# Altium PCB XL992FXT10W.PcbDoc (part 2 of 2)
Units mm, origin at the board's own origin, x right, y up, seen from the top; angles counter-clockwise.
Board outline 35.2 x 48.31 mm, 2 copper layers (Top Layer, Bottom Layer); 89 components, 57 nets, 280 pads, 137 vias.
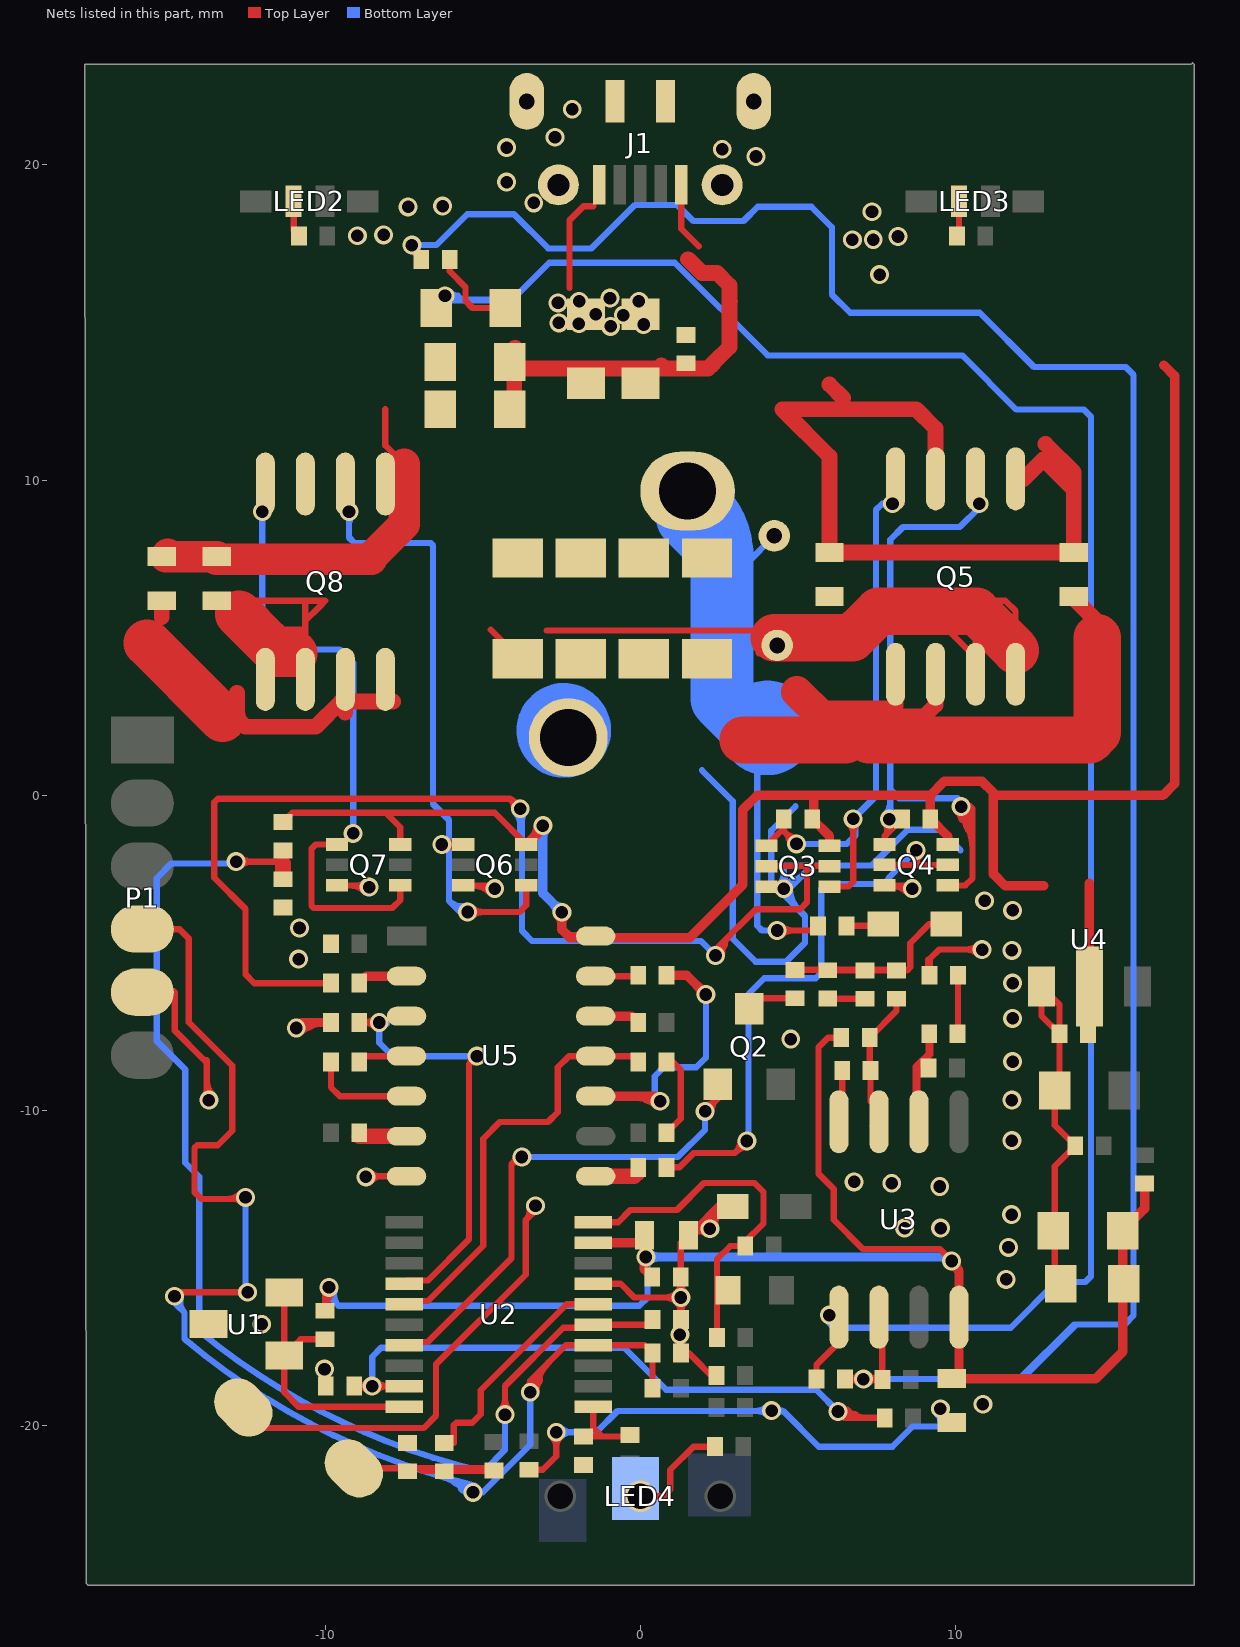
[diagram p2: the nets of this part, all layers, seen from the top]

## Via types
v1: diameter 0.6, hole 0.4, Top Layer to Bottom Layer, 137 vias

## Nets (pads, with @x,y where several pads share a name; then routed paths per layer and width w, separated by ;. In a path a pad name is that pad's centre, name@x,y a point inside that pad or via, vN(x,y) a via of type N, cw(c..) or ccw(c..) an arc to the next point about the centre after c; other vN are vias at no path point) (continued)
GND: C0.1 C1.1 C4.1 C5.1 C6.1 C8.1 C9.1 C10.2 C11.2 C13.1 C14.2 C15.2 C16.2 C17.1 C18.2 C19.1 C20.2 C34.1 D3.2 J1.5 J1.6 P1.5 pad.1@-12.598,-19.431 Q3.3 Q4.3 Q6.3 Q7.3 R7.1 R12.2 R13.1 R16.2 R31.1 R32.1 R35.2 R38.2 R40.2 R43.2 RTC1.1 U1.1 U2.7 U3.4 U4.Vss U5.7 | length 145.6
  Top Layer w0.2: P1.5@-15.8,-6.25 -14.835,-6.25 -14.808,-6.223 -14.778,-6.253 -14.778,-7.466 -13.837,-8.407 -13.763,-8.407 -13.763,-9.675 v1(-13.691,-9.675) ; pad.1@-12.598,-19.431 -11.945,-20.085 -6.879,-20.085 -6.482,-19.689 -6.482,-18.063 -3.638,-15.218 -3.638,-13.493 ; v1(-10.021,-18.212) -9.98,-18.253 C10.2@-9.98,-18.754 ; Q7.3@-9.619,-2.864 -8.769,-2.864 v1@-8.619,-2.714 ; v1@-8.784,-12.092 U5.7@-7.416,-12.092 ; R16.2@-6.05,17 -6.05,16.625 -5.548,16.122 -5.548,15.685 -5.325,15.462 R13.1@-4.282,15.462 ; Q6.3@-5.619,-2.864 -4.719,-2.864 v1(-4.619,-2.964) ; C9.1@-3.477,-21.407 -3.094,-21.407 -2.667,-20.98 v1(-2.667,-20.218) ; v1(-3.327,-13.03) -3.277,-13.081 -3.277,-13.132 -3.638,-13.493 ; -2.246,16.1 -2.246,18.25 -1.804,18.691 -1.489,18.691 ; U2.7@-1.493,-15.504 -0.626,-15.504 -0.19,-15.941 v1@1.281,-15.941 ; C15.2@-0.104,15.582 C15.2@0.059,15.744 ; R40.2@0.831,-10.714 1.281,-10.264 1.281,-8.719 1.026,-8.464 R43.2@0.831,-8.464 ; v1@2.101,-13.589 ccw(c1.949,-13.345) 2.236,-13.367 ccw(c2.522,-13.388) v1@2.336,-13.606 ; R31.1@2.43,-18.593 1.541,-17.704 C11.2@1.288,-17.704 C0.1@1.288,-16.637 ; 2.434,-13.308 cw(c1.776,-13.259) v1(2.206,-13.759) ; D3.2@2.683,-12.802 D3.2@2.683,-12.812 ; C4.1@5.949,-6.453 5.96,-6.464 R7.1@7.131,-6.464 ; U3.4@6.304,-10.365 6.408,-10.261 R12.2@6.408,-8.732 ; Q4.3@7.756,-2.864 8.531,-2.864 v1(8.631,-2.964) ; 9.131,-5.214 9.131,-5.664 C8.1@9.181,-5.714 9.181,-5.197 9.479,-4.9 v1(10.85,-4.9) ; C34.1@13.304,-7.571 12.73,-6.997 U4.Vss@12.73,-6.071 13.304,-6.645 13.304,-9.225 C18.2@13.154,-9.375 13.154,-10.475 C20.2@13.804,-11.125 13.154,-11.775 13.154,-15.281 C5.1@13.379,-15.506 ; -3.638,-13.493 ccw(c-3.949,-13.182) -3.522,-13.078 cw(c-3.949,-13.182) -3.638,-13.493 ; -2.667,-20.701 ccw(c-3.15,-20.701) -2.808,-20.36 cw(c-3.15,-20.701) -2.667,-20.701 ; -2.667,-20.701 cw(c-2.184,-20.701) -2.526,-20.36 ccw(c-2.184,-20.701) -2.667,-20.701 ; 0.805,-15.941 ccw(c0.805,-15.458) v1@1.147,-15.799 ; 0.805,-15.941 cw(c0.805,-16.423) v1@1.147,-16.082 ; 0.805,-15.941 ccw(c0.805,-15.458) v1@1.147,-15.799 ; 0.805,-15.941 cw(c0.805,-16.423) v1@1.147,-16.082 ; v1@1.147,-16.082 cw(c0.822,-16.407) 1.281,-16.407 ccw(c0.822,-16.407) v1@1.147,-16.082 ; v1@1.147,-16.082 cw(c0.805,-16.423) C0.1@1.288,-16.423 ; v1@1.147,-16.082 cw(c0.805,-16.423) C0.1@1.288,-16.423 ; v1@1.147,-15.799 ccw(c0.822,-15.474) 1.281,-15.474 cw(c0.822,-15.474) v1@1.147,-15.799 ; v1@1.147,-15.799 ccw(c0.805,-15.458) C13.1@1.288,-15.458 ; v1@1.147,-15.799 ccw(c0.805,-15.458) C13.1@1.288,-15.458 ; v1@1.281,-15.941 1.281,-16.63 C0.1@1.288,-16.637 ; v1@1.281,-15.941 C13.1@1.281,-15.291 C13.1@1.288,-15.291 ; v1@1.281,-15.941 v1(1.288,-15.941) ; C0.1@1.288,-16.637 cw(c0.874,-16.637) 1.13,-16.962 ccw(c0.874,-16.637) C0.1@1.288,-16.637 ; C0.1@1.288,-16.637 v1(1.288,-15.941) ; C0.1@1.288,-16.423 cw(c1.771,-16.423) v1@1.43,-16.082 ; C0.1@1.288,-16.423 cw(c1.771,-16.423) v1@1.43,-16.082 ; v1(1.288,-15.941) C13.1@1.288,-15.291 ; C13.1@1.288,-15.458 ccw(c1.771,-15.458) v1@1.43,-15.799 ; C13.1@1.288,-15.458 ccw(c1.771,-15.458) v1@1.43,-15.799 ; C13.1@1.288,-15.291 1.288,-14.207 C1.1@1.531,-13.964 ; v1@1.43,-16.082 ccw(c1.788,-16.44) 1.281,-16.44 cw(c1.788,-16.44) v1@1.43,-16.082 ; v1@1.43,-15.799 cw(c1.788,-15.441) 1.281,-15.441 ccw(c1.788,-15.441) v1@1.43,-15.799 ; C1.1@1.531,-13.964 cw(c1.835,-14.268) 2.089,-13.92 ccw(c1.835,-14.268) C1.1@1.531,-13.964 ; C1.1@1.531,-13.964 D3.2@2.683,-12.812 ; v1(2.206,-13.759) cw(c2.953,-13.617) 2.416,-13.079 ccw(c2.953,-13.617) v1(2.206,-13.759) ; v1(2.206,-13.759) ccw(c1.975,-14.077) 1.697,-13.798 cw(c1.975,-14.077) v1(2.206,-13.759) ; D3.2@2.683,-12.812 ccw(c3.402,-13.531) 2.403,-13.721 cw(c3.402,-13.531) D3.2@2.683,-12.812 ; 10.367,-4.9 ccw(c10.367,-4.417) 10.709,-4.758 cw(c10.367,-4.417) 10.367,-4.9 ; 10.367,-4.9 cw(c10.367,-5.383) 10.709,-5.041 ccw(c10.367,-5.383) 10.367,-4.9 ; v1@-13.832,-9.534 ccw(c-13.997,-9.368) -13.763,-9.368 cw(c-13.997,-9.368) v1@-13.832,-9.534 ; -13.763,-9.016 ccw(c-13.032,-9.016) -13.549,-9.534 cw(c-13.032,-9.016) -13.763,-9.016 ; v1@-10.156,-18.36 cw(c-10.513,-18.756) -9.98,-18.756 ccw(c-10.513,-18.756) v1@-10.156,-18.36 ; C10.2@-9.98,-18.595 cw(c-9.638,-18.595) -9.88,-18.353 ccw(c-9.638,-18.595) C10.2@-9.98,-18.595 ; -9.221,-2.864 cw(c-9.221,-3.534) -8.748,-3.06 ccw(c-9.221,-3.534) -9.221,-2.864 ; -8.957,-2.864 ccw(c-8.957,-2.568) -8.748,-2.777 cw(c-8.957,-2.568) -8.957,-2.864 ; v1@-8.566,-12.255 cw(c-8.174,-12.647) -8.174,-12.092 ccw(c-8.174,-12.647) v1@-8.566,-12.255 ; v1@-8.566,-11.972 ccw(c-8.276,-11.681) -8.276,-12.092 cw(c-8.276,-11.681) v1@-8.566,-11.972 ; Q6.3@-5.343,-2.864 cw(c-5.343,-3.688) -4.76,-3.105 ccw(c-5.343,-3.688) Q6.3@-5.343,-2.864 ; v1@1.113,-17.261 cw(c0.689,-17.685) 1.288,-17.685 ccw(c0.689,-17.685) v1@1.113,-17.261 ; C11.2@1.288,-17.52 cw(c1.654,-17.52) 1.395,-17.261 ccw(c1.654,-17.52) C11.2@1.288,-17.52 ; C0.1@1.288,-16.719 ccw(c1.654,-16.719) 1.395,-16.978 cw(c1.654,-16.719) C0.1@1.288,-16.719 ; 1.862,-13.633 cw(c2.114,-13.885) 2.324,-13.597 ccw(c2.114,-13.885) 1.862,-13.633 ; v1@2.01,-13.796 cw(c2.504,-13.702) 2.148,-13.347 ccw(c2.504,-13.702) v1@2.01,-13.796 ; Q4.3@7.907,-2.864 cw(c7.907,-3.688) 8.49,-3.105 ccw(c7.907,-3.688) Q4.3@7.907,-2.864
  Top Layer w0.3: v1(-10.918,-7.389) -10.742,-7.214 R38.2@-9.819,-7.214 ; v1@-10.829,-7.268 ccw(c-10.626,-6.99) -10.454,-7.288 ; v1@-10.812,-7.495 cw(c-10.133,-8.174) -10.133,-7.214 ccw(c-10.133,-8.174) v1@-10.812,-7.495
  Bottom Layer w0.2: v1(-2.667,-20.218) -1.398,-20.218 -0.723,-19.543 4.532,-19.543 ; 1.956,0.787 2.929,-0.186 2.929,-4.555 3.658,-5.283 4.623,-5.283 5.226,-4.68 5.226,-3.835 4.551,-3.16 v1(4.551,-2.969) ; 4.686,-3.295 cw(c5.011,-2.969) v1(4.551,-2.969) ; v1@4.751,-2.969 ccw(c5.694,-2.969) 5.027,-3.636 ; 4.908,-2.674 ccw(c5.053,-3.212) v1(4.551,-2.969) ; 4.928,-0.353 4.158,-1.122 4.158,-2.87 4.258,-2.969 v1(4.551,-2.969) ; v1(9.525,-19.471) 9.525,-19.881 ; 10.164,-1.75 9.514,-1.1 8.485,-1.1 7.352,-2.233 5.465,-2.233 ; -2.184,-20.218 ccw(c-2.184,-20.701) -2.526,-20.36 cw(c-2.184,-20.701) -2.184,-20.218 ; -2.184,-20.218 cw(c-2.184,-19.736) -2.526,-20.077 ccw(c-2.184,-19.736) -2.184,-20.218 ; 4.532,-19.543 ccw(c4.532,-19.791) 4.329,-19.648 cw(c4.532,-19.791) 4.532,-19.543 ; 4.532,-19.543 cw(c4.532,-19.319) 4.338,-19.432 ccw(c4.532,-19.319) 4.532,-19.543 ; 4.532,-19.543 5.664,-20.676 8.001,-20.676 8.644,-20.033 9.677,-20.033 9.525,-19.881 ; v1(4.551,-2.969) ccw(c4.551,-2.54) 4.854,-2.844 cw(c4.551,-2.54) v1(4.551,-2.969) ; v1(4.551,-2.969) 4.729,-2.969 5.465,-2.233 ; v1(4.551,-2.969) 4.551,-2.385 4.5,-2.334 4.602,-2.233 5.465,-2.233 ; 4.551,-2.487 ccw(c5.034,-2.487) 4.692,-2.828 cw(c5.034,-2.487) 4.551,-2.487 ; 4.551,-2.487 cw(c4.068,-2.487) 4.41,-2.828 ccw(c4.068,-2.487) 4.551,-2.487 ; 9.525,-19.881 ccw(c9.207,-19.881) 9.402,-19.629 cw(c9.207,-19.881) 9.525,-19.881 ; 9.525,-19.881 cw(c9.843,-19.881) 9.648,-19.629 ccw(c9.843,-19.881) 9.525,-19.881 ; 3.658,-19.543 ccw(c3.658,-19.025) 4.024,-19.391 cw(c3.658,-19.025) 3.658,-19.543 ; 3.708,-19.543 cw(c3.708,-19.99) 4.024,-19.674 ccw(c3.708,-19.99) 3.708,-19.543 ; v1@4.551,-2.769 ccw(c4.551,-1.857) 5.196,-2.502 cw(c4.551,-1.857) v1@4.551,-2.769
  other v1: 4.166,-19.533 10.871,-19.329 1.254,-17.12 -12.014,-16.789 11.608,-15.367 11.684,-14.351 8.386,-13.739 9.529,-13.739 11.786,-13.31 9.504,-12.418 7.98,-12.317 6.786,-12.271 -8.708,-12.113 11.79,-10.964 11.79,-9.675 11.815,-8.456 4.775,-7.74 11.815,-7.084 11.815,-5.967 -10.841,-5.205 11.79,-4.925 -10.816,-4.214 11.815,-3.655 10.926,-3.35 -8.606,-2.919 -0.942,14.878 0.106,14.938 -1.951,14.963 -2.586,14.988 -0.54,15.233 -1.415,15.259 -2.612,15.623 -1.941,15.674 -0.046,15.674 -0.961,15.776 7.595,16.518 6.731,17.628 7.391,17.63 8.179,17.729 -8.981,17.755 -8.145,17.78 7.352,18.517 -7.366,18.669 -6.274,18.694 -3.38,18.796 -4.242,19.456 3.671,20.269 2.6,20.498 -4.242,20.549 -2.708,20.879 -2.159,21.768
IN_VCC_AD: C0.2 R26.1 R32.2 U2.5 | length 40.9
  Top Layer w0.2: v1(-12.827,-2.108) -11.397,-2.108 -11.34,-2.166 R26.1@-11.34,-1.752 ; v1@-12.686,-2.25 cw(c-12.344,-2.591) -12.344,-2.108 cw(c-12.344,-1.625) v1@-12.686,-1.967 ; v1(-4.293,-19.66) -4.293,-18.748 -2.448,-16.904 -1.593,-16.904 U2.5@-1.493,-16.804 C0.2@0.381,-16.804 ; -4.293,-19.177 ccw(c-3.81,-19.177) -4.151,-19.518 cw(c-3.81,-19.177) -4.293,-19.177 ; -4.293,-19.177 cw(c-4.775,-19.177) -4.434,-19.518 ccw(c-4.775,-19.177) -4.293,-19.177
  Top Layer w0.5: R32.2@-11.34,-2.664 -11.34,-2.166
  Bottom Layer w0.2: -14.003,-16.996 ccw(c0.004,-0.032) -5.092,-21.433 -4.949,-21.433 -4.293,-20.777 v1(-4.293,-19.66) ; -14,-16.967 -14,-12.114 -14.445,-11.669 -14.445,-8.705 -15.35,-7.8 -15.35,-2.639 -14.876,-2.166 v1@-12.827,-2.166
NA_PWM: R38.1 U2.14 U5.3 | length 16.2
  Top Layer w0.2: R38.1@-8.919,-7.214 v1(-8.285,-7.214) ; U2.14@-7.493,-15.504 -7.393,-15.404 -6.748,-15.404 -5.438,-14.094 -5.438,-8.537 ; U5.3@-7.416,-7.012 U5.3@-7.07,-7.012 ; v1(-5.182,-8.28) -5.438,-8.537 ; R38.1@-8.768,-7.214 ccw(c-8.768,-6.731) -8.426,-7.072 cw(c-8.768,-6.731) R38.1@-8.768,-7.214 ; R38.1@-8.768,-7.214 cw(c-8.768,-7.697) -8.426,-7.355 ccw(c-8.768,-7.697) R38.1@-8.768,-7.214 ; -5.438,-8.537 ccw(c-5.599,-8.375) -5.377,-8.325 cw(c-5.599,-8.375) -5.438,-8.537 ; -5.438,-8.537 cw(c-5.276,-8.698) -5.226,-8.475 ccw(c-5.276,-8.698) -5.438,-8.537
  Bottom Layer w0.2: v1@-8.042,-7.257 -8.085,-7.214 v1(-8.285,-7.214) -8.285,-7.852 -7.856,-8.28 v1(-5.182,-8.28)
NB_PWM: R43.1 U2.15 U5.11 | length 13.6
  Top Layer w0.2: U2.15@-7.493,-16.154 -7.393,-16.054 -6.748,-16.054 -4.988,-14.294 -4.988,-10.904 -4.457,-10.372 -2.93,-10.372 -2.616,-10.058 -2.616,-8.636 -2.263,-8.282 U5.11@-1.416,-8.282 -0.25,-8.282 R43.1@-0.069,-8.464
NetC3_1: C3.1 C4.2 D1.2 R7.2 R8.1 | length 8.1
  Top Layer w0.2: R8.1@4.908,-5.544 8.112,-5.544 C3.1@8.131,-5.564 ; C4.2@5.949,-5.553 R7.2@7.131,-5.553 ; R7.2@7.131,-5.564 C3.1@8.131,-5.564 ; D1.2@9.717,-4.087 9.174,-4.087 8.564,-4.697 8.564,-5.462 8.463,-5.564 C3.1@8.131,-5.564
NetC3_2: C3.2 R9.2 R12.1 U3.3 | length 5.2
  Top Layer w0.2: U3.3@7.381,-10.499 U3.3@7.496,-10.614 ; U3.3@7.574,-10.365 7.531,-9.714 7.574,-9.672 7.574,-9.982 7.308,-9.717 R12.1@7.308,-8.732 7.279,-8.703 R9.2@7.279,-7.696 8.131,-6.844 C3.2@8.131,-6.464
NetC6_2: C6.2 R10.1 U2.1 | length 2.9
  Top Layer w0.2: C6.2@-1.803,-20.353 -1.219,-20.353 ; U2.1@-1.177,-19.404 U2.1@-1.493,-19.404 -1.493,-20.079 -1.219,-20.353 ; R10.1@-0.33,-20.302 -0.381,-20.353 -1.219,-20.353
NetC7_2: C7.2 R16.1 R17.1 U3.6 | length 77.6
  Top Layer w0.2: v1(-7.25,17.457) -7.25,17.3 R16.1@-6.95,17 ; C7.2@6.493,-18.53 v1(7.08,-18.53) 7.668,-18.53 R17.1@7.682,-18.545 7.682,-16.674 U3.6@7.574,-16.565 ; R16.1@-6.95,17 cw(c-6.656,17.294) -7.057,17.404 ccw(c-6.656,17.294) R16.1@-6.95,17 ; C7.2@6.598,-18.53 ccw(c6.598,-18.048) 6.939,-18.389 cw(c6.598,-18.048) C7.2@6.598,-18.53 ; C7.2@6.598,-18.53 cw(c6.598,-19.013) 6.939,-18.672 ccw(c6.598,-19.013) C7.2@6.598,-18.53 ; R17.1@7.563,-18.53 ccw(c7.563,-19.013) 7.222,-18.672 cw(c7.563,-19.013) R17.1@7.563,-18.53 ; R17.1@7.563,-18.53 cw(c7.563,-18.048) 7.222,-18.389 ccw(c7.563,-18.048) R17.1@7.563,-18.53
  Bottom Layer w0.2: v1(-7.25,17.457) -6.47,17.457 -5.492,18.435 -4.008,18.435 -2.924,17.351 -1.549,17.351 -0.171,18.73 1.177,18.73 1.686,18.221 3.274,18.221 3.727,18.674 5.431,18.674 6.081,18.024 6.081,15.89 6.665,15.306 10.776,15.306 12.495,13.588 15.402,13.588 15.654,13.335 15.654,-16.51 15.365,-16.8 13.829,-16.8 ; v1(7.08,-18.53) 12.098,-18.53 13.829,-16.8 ; 12.064,-18.497 13.762,-16.8 13.829,-16.8
NetC8_2: C8.2 R11.1 | length 1.9
  Top Layer w0.2: R11.1@10.068,-7.571 10.081,-7.557 C8.2@10.081,-5.714
NetC10_1: C10.1 R2.1 U2.19 | length 27.2
  Top Layer w0.2: C10.1@-9.08,-18.754 v1(-8.509,-18.754) U2.19@-7.493,-18.754 U2.19@-7.393,-18.654 ; v1@6.368,-19.734 cw(c6.474,-19.93) 6.585,-19.738 cw(c6.696,-19.545) v1@6.474,-19.552 ; v1@6.406,-19.708 cw(c6.656,-19.995) 6.846,-19.665 ; 6.604,-19.526 ccw(c6.462,-19.773) v1(6.274,-19.558) ; R2.1@7.754,-19.761 6.477,-19.761 v1(6.274,-19.558) ; C10.1@-8.992,-18.754 ccw(c-8.992,-18.271) -8.65,-18.613 cw(c-8.992,-18.271) C10.1@-8.992,-18.754 ; C10.1@-8.992,-18.754 cw(c-8.992,-19.237) -8.65,-18.895 ccw(c-8.992,-19.237) C10.1@-8.992,-18.754 ; U2.19@-8.026,-18.754 ccw(c-8.026,-19.237) -8.368,-18.895 cw(c-8.026,-19.237) U2.19@-8.026,-18.754 ; U2.19@-8.026,-18.754 cw(c-8.026,-18.271) -8.368,-18.613 ccw(c-8.026,-18.271) U2.19@-8.026,-18.754 ; v1(6.274,-19.558) ccw(c6.764,-19.067) 6.764,-19.761 cw(c6.764,-19.067) v1(6.274,-19.558) ; v1@6.415,-19.417 ccw(c7.247,-18.585) 7.247,-19.761 cw(c7.247,-18.585) v1@6.415,-19.417
  Bottom Layer w0.2: v1(-8.509,-18.754) -8.509,-17.82 -8.23,-17.54 -0.515,-17.54 0.817,-18.872 5.588,-18.872 v1(6.274,-19.558)
NetC23_2: C23.2 C25.1 C26.2 C27.2 C29.2 C30.2 pad.0@4.343,4.753 Q5.C1 Q8.C2 | length 48.5
  Top Layer w0.2: C29.2@-13.44,6.171 -10.575,6.171 ; Q8.C2@-11.901,3.674 -11.901,4.845 -11.496,5.25 -10.631,5.25 ; Q8.C2@-10.631,3.674 -10.631,5.25 ; -4.746,5.25 C23.2@-3.996,4.5 ; -2.973,5.227 3.81,5.227 ; 3.754,4.5 4.254,5 4.504,5.25 6.974,5.25 9.754,5.25 Q5.C1@10.639,4.365 ; pad.0@4.061,5.036 cw(c4.578,4.518) 4.578,5.25 ; pad.0@4.202,4.894 cw(c5.061,4.035) 5.061,5.25 ; pad.0@4.343,4.753 cw(c5.544,3.552) 5.544,5.25 ; pad.0@4.485,4.611 cw(c6.027,3.069) 6.027,5.25 ; pad.0@4.626,4.47 cw(c6.51,2.586) 6.51,5.25 ; Q5.C1@10.639,3.837 Q5.C1@10.639,4.365 ; Q5.C1@11.909,3.837 11.909,4.595 11.909,5.845 11.584,6.171 10.334,6.171 10.639,5.865 10.639,5.837 Q5.C1@10.639,4.365 ; -10.631,5.25 -10.631,5.536 ; -10.631,5.536 -10.166,6 -9.996,6.171 -10.575,6.171 ; -10.631,5.536 -10.631,6 -10.631,6.115 -10.575,6.171
  Top Layer w1.5: -12.746,5.75 -11.871,4.875 -11.496,4.5 -10.996,4.5 ; pad.0@4.254,5 6.724,5 6.974,5.25 7.561,5.837 10.639,5.837 10.668,5.837 Q5.C1@11.909,4.595
NetD1_1: D1.1 R5.1 | length 1.2
  Top Layer w0.2: R5.1@6.54,-4.147 7.657,-4.147 D1.1@7.717,-4.087
NetLED2_1: LED2.1 R24.2 | length 1.2
  Top Layer w0.2: LED2.1@-11.002,18.843 -11.002,17.918 R24.2@-10.834,17.75
NetLED3_1: LED3.1 R22.2 | length 1.2
  Top Layer w0.2: R22.2@10.034,17.63 10.115,17.711 LED3.1@10.115,18.843
NetLED4_2: LED4.2 pad.0@-0.152,-21.996 R21.2 | length 3.4
  Top Layer w0.2: LED4.2@0,-22.25 0.737,-22.25 0.95,-22.037 0.95,-21.412 1.687,-20.676 R21.2@2.369,-20.676
NetQ2_C: Q2.C R8.2 | length 1.6
  Top Layer w0.2: Q2.C@3.462,-6.776 3.793,-6.444 R8.2@4.908,-6.444
NetQ3_1: Q3.1 Q3.4 Q5.B2 R33.2 | length 22.4
  Top Layer w0.2: Q3.1@4.004,-1.6 4.504,-1.1 ; R33.2@4.554,-0.75 4.554,-1.144 v1(4.957,-1.547) ; 4.69,-1.295 ccw(c5.027,-1.205) v1(4.957,-1.547) ; 4.705,-1.279 cw(c4.615,-1.617) v1(4.957,-1.547) ; v1@4.707,-1.398 v1@4.805,-1.496 ; Q3.4@6.004,-2.9 6.604,-2.9 6.754,-2.75 v1(6.754,-0.75) ; 4.616,-1.206 ccw(c4.957,-0.864) 4.957,-1.347 cw(c4.957,-0.864) 4.616,-1.206 ; 4.616,-1.206 cw(c4.275,-1.547) 4.757,-1.547 ccw(c4.275,-1.547) 4.616,-1.206 ; 6.754,-1.233 ccw(c6.271,-1.233) 6.613,-0.891 cw(c6.271,-1.233) 6.754,-1.233 ; 6.754,-1.233 cw(c7.237,-1.233) 6.896,-0.891 ccw(c7.237,-1.233) 6.754,-1.233
  Bottom Layer w0.2: v1(4.957,-1.547) 6.558,-1.547 6.829,-1.276 6.829,-0.675 7.479,-0.025 7.479,9.054 7.675,9.25 ; v1(8.004,9.25) 7.675,9.25 ; 7.675,9.25 ccw(c7.675,9.421) 7.827,9.342 cw(c7.675,9.421) 7.675,9.25 ; 7.675,9.25 cw(c7.675,9.079) 7.827,9.158 ccw(c7.675,9.079) 7.675,9.25
NetQ4_1: Q4.1 Q4.4 Q5.B1 R34.1 | length 29.9
  Top Layer w0.2: Q4.1@7.756,-1.564 7.756,-1.298 ; R34.1@8.304,-0.75 7.756,-1.298 ; Q4.4@9.756,-2.864 10.317,-2.864 10.545,-2.635 10.545,-0.429 v1@10.469,-0.353 ; v1@10.132,-0.555 cw(c10.007,-1.022) 10.425,-0.78 cw(c10.843,-0.539) v1@10.376,-0.414 ; 10.212,-0.783 cw(c10.602,-0.545) v1(10.183,-0.362) ; v1@10.367,-0.442 ccw(c11.032,-0.733) 10.412,-1.111 ; 7.756,-1.298 ccw(c7.555,-1.096) 7.76,-0.899 cw(c7.555,-1.096) 7.756,-1.298 ; v1(10.183,-0.362) cw(c9.309,-1.236) 10.545,-1.236 ccw(c9.309,-1.236) v1(10.183,-0.362) ; 7.9,-1.154 ccw(c7.701,-0.955) v1(7.904,-0.76) cw(c7.701,-0.955) 7.9,-1.154 ; v1@10.042,-0.504 cw(c8.826,-1.719) 10.545,-1.719 ccw(c8.826,-1.719) v1@10.042,-0.504 ; v1@10.325,-0.221 cw(c9.792,-0.753) 10.545,-0.753 ccw(c9.792,-0.753) v1@10.325,-0.221
  Bottom Layer w0.2: v1(7.904,-0.76) 7.929,-0.734 7.929,0.179 ; v1@10.2,-0.231 10.069,-0.1 8.209,-0.1 7.929,0.179 ; v1(10.754,9.25) 10.754,9.127 10.139,8.511 8.336,8.511 7.929,8.105 7.929,0.179 ; v1@7.762,-0.618 ccw(c7.36,-0.215) 7.929,-0.215 cw(c7.36,-0.215) v1@7.762,-0.618 ; 7.929,-0.338 ccw(c8.325,-0.338) 8.045,-0.618 cw(c8.325,-0.338) 7.929,-0.338
NetQ6_1: Q6.1 Q6.4 Q8.B1 | length 24.1
  Top Layer w0.2: v1(-6.299,-1.564) Q6.1@-5.619,-1.564 Q6.1@-5.6,-1.564 ; v1(-5.482,-3.706) -3.831,-3.706 -3.619,-3.494 Q6.4@-3.619,-2.864 ; Q6.1@-5.816,-1.564 ccw(c-5.816,-2.047) -6.158,-1.705 cw(c-5.816,-2.047) Q6.1@-5.816,-1.564 ; Q6.1@-5.816,-1.564 cw(c-5.816,-1.081) -6.158,-1.422 ccw(c-5.816,-1.081) Q6.1@-5.816,-1.564 ; -4.999,-3.706 ccw(c-4.999,-4.189) -5.341,-3.847 cw(c-4.999,-4.189) -4.999,-3.706 ; -4.999,-3.706 cw(c-4.999,-3.223) -5.341,-3.565 ccw(c-4.999,-3.223) -4.999,-3.706
  Bottom Layer w0.2: v1(-9.246,9) v1@-9.246,8.73 ; -9.216,8.7 v1@-9.246,8.73 ; v1@-9.246,8.73 -9.246,8.179 -9.068,8.001 -6.655,8.001 -6.579,7.925 -6.579,-0.279 -6.071,-0.787 -6.071,-3.353 ; -6.071,-3.353 ccw(c-5.655,-2.937) -5.526,-3.511 cw(c-5.655,-2.937) -6.071,-3.353 ; -6.071,-3.353 -5.717,-3.706 v1(-5.482,-3.706) ; v1(-5.482,-3.706) cw(c-5.56,-3.357) -5.814,-3.61 ccw(c-5.56,-3.357) v1(-5.482,-3.706)
NetQ7_1: Q7.1 Q7.4 Q8.B2 | length 18.8
  Top Layer w0.2: Q7.1@-9.619,-1.564 -10.299,-1.564 -10.435,-1.699 -10.435,-3.503 -10.359,-3.579 -7.87,-3.579 -7.619,-3.328 Q7.4@-7.619,-2.864
  Bottom Layer w0.2: v1(-11.996,9) -11.996,4.84 -11.781,4.625 -9.546,4.625 -9.114,4.193 v1(-9.114,-1.21)
NetR1_2: pad.1@-9.093,-21.361 R1.2 R23.1 RTC1.2 | length 6.9
  Top Layer w0.2: pad.1@-9.093,-21.361 -4.565,-21.361 R1.2@-4.496,-21.43 ; -6.916,-21.45 R1.2@-4.619,-21.45
NetR6_2: R6.2 U1.2 U1.3 U2.20 | length 8.7
  Top Layer w0.2: U1.2@-11.3,-15.782 U1.3@-11.3,-17.782 ; R6.2@-10.001,-17.262 -10.781,-17.262 U1.3@-11.3,-17.782 ; U2.20@-7.493,-19.404 -10.847,-19.404 -11.3,-18.951 U1.3@-11.3,-17.782
NetR11_2: R11.2 R18.2 U3.2 | length 3.2
  Top Layer w0.25: U3.2@8.766,-10.614 8.766,-8.629 9.181,-8.214 R11.2@9.181,-7.571
NetR36_1: R36.1 U5.2 | length 1.6
  Top Layer w0.3: R36.1@-8.919,-5.964 -8.697,-5.742 U5.2@-7.416,-5.742
NetR37_1: R37.1 U5.4 | length 1.6
  Top Layer w0.2: R37.1@-8.919,-8.464 -8.737,-8.282 U5.4@-7.416,-8.282
NetR37_2: R37.2 U5.5 | length 3.3
  Top Layer w0.2: R37.2@-9.819,-8.464 -9.819,-9.264 -9.53,-9.552 U5.5@-7.416,-9.552
NetR39_1: R39.1 U5.6 | length 1.4
  Top Layer w0.5: R39.1@-8.913,-10.82 U5.6@-7.518,-10.82
NetR41_1: R41.1 U5.8 | length 1.4
  Top Layer w0.5: U5.8@-1.416,-12.092 -0.197,-12.092 R41.1@-0.069,-11.964
NetR42_1: R42.1 U5.10 | length 11.3
  Top Layer w0.3: U5.10@-1.416,-9.552 0.47,-9.552 v1(0.631,-9.714) ; 0.188,-9.625 ccw(c0.342,-9.359) v1@0.537,-9.597 ; R42.1@0.831,-5.714 1.472,-5.714 v1(2.083,-6.325) ; 1.827,-6.069 ccw(c2.083,-5.812) 2.083,-6.175 cw(c2.083,-5.812) 1.827,-6.069 ; 1.827,-6.069 cw(c1.571,-6.325) 1.933,-6.325 ccw(c1.571,-6.325) 1.827,-6.069 ; -0.121,-9.552 cw(c-0.121,-10.466) 0.525,-9.82 ccw(c-0.121,-10.466) -0.121,-9.552
  Bottom Layer w0.2: v1(0.631,-9.714) 0.457,-9.54 0.457,-8.915 0.737,-8.636 1.778,-8.636 2.083,-8.331 v1(2.083,-6.325)
NetR42_2: R42.2 U5.13 | length 1.4
  Top Layer w0.2: U5.13@-1.416,-5.742 -0.097,-5.742 R42.2@-0.069,-5.714
NetR44_1: R44.1 U5.12 | length 1.4
  Top Layer w0.3: U5.12@-1.416,-7.012 -0.27,-7.012 R44.1@-0.069,-7.214
NRST: C11.1 P1.4 R4.2 U2.4 | length 53.1
  Top Layer w0.2: P1.4@-15.8,-4.25 -14.625,-4.25 -14.328,-4.547 -14.328,-7.206 -12.949,-8.585 -12.949,-10.652 -13.407,-11.11 -14.064,-11.11 -14.147,-11.194 -14.147,-12.598 -13.934,-12.812 -12.579,-12.812 v1(-12.531,-12.764) ; v1(-14.783,-15.9) -14.656,-15.773 v1(-12.464,-15.773) ; v1@-3.584,-18.771 ccw(c-3.778,-18.401) -3.374,-18.509 ccw(c-2.97,-18.616) v1@-3.323,-18.841 ; -3.184,-18.548 cw(c-3.822,-18.378) v1(-3.491,-18.948) ; -2.891,-17.983 -2.362,-17.454 U2.4@-1.493,-17.454 0.138,-17.454 C11.1@0.388,-17.704 R4.2@0.388,-18.821 ; v1(-3.491,-18.948) cw(c-2.612,-18.947) -3.234,-18.326 ccw(c-2.612,-18.947) v1(-3.491,-18.948) ; v1(-3.491,-18.948) -3.491,-18.583 ; -3.491,-18.583 ccw(c-3.258,-18.583) -3.383,-18.78 cw(c-3.258,-18.583) -3.491,-18.583 ; -3.491,-18.583 cw(c-3.725,-18.583) -3.599,-18.78 ccw(c-3.725,-18.583) -3.491,-18.583 ; -3.491,-18.583 -2.893,-17.985 ; -2.893,-17.985 ccw(c-1.931,-18.946) -3.291,-18.948 cw(c-1.931,-18.946) -2.893,-17.985 ; -13.13,-12.812 ccw(c-13.13,-12.164) -12.672,-12.622 cw(c-13.13,-12.164) -13.13,-12.812 ; -12.897,-12.812 cw(c-12.897,-13.13) -12.672,-12.905 ccw(c-12.897,-13.13) -12.897,-12.812
  Bottom Layer w0.2: v1@-14.707,-16.18 -14.462,-16.424 ; v1(-12.531,-12.764) -12.531,-15.706 v1(-12.464,-15.773) ; -5.935,-21.774 ccw(c-5.511,-21.346) v1@-5.359,-21.93 ; -5.686,-22.022 ccw(c-5.408,-21.741) v1(-5.309,-22.123) ; v1@-5.257,-21.908 cw(c0.004,-0.032) -14.424,-17.297 -14.462,-17.259 -14.462,-16.424 ; v1@-3.643,-19.1 v1(-3.491,-18.948) -3.491,-20.612 -5.002,-22.123 ; -14.462,-16.424 cw(c-14.115,-16.077) -14.589,-15.952 ccw(c-14.115,-16.077) -14.462,-16.424 ; v1(-5.309,-22.123) ccw(c-5.961,-22.504) -5.769,-21.774 cw(c-5.961,-22.504) v1(-5.309,-22.123) ; v1(-5.309,-22.123) -5.002,-22.123 ; -5.002,-22.123 ccw(c-5.002,-22.258) -5.125,-22.204 cw(c-5.002,-22.258) -5.002,-22.123 ; -5.002,-22.123 cw(c-5.002,-21.989) -5.125,-22.043 ccw(c-5.002,-21.989) -5.002,-22.123 ; -6.236,-21.651 cw(c-6.551,-22.848) -5.481,-22.224 ccw(c-6.551,-22.848) -6.236,-21.651
QC20: D2.1 R27.1 R28.2 U2.10 | length 11.8
  Top Layer w0.2: U2.10@-1.493,-13.554 -0.704,-13.554 -0.314,-13.164 1.163,-13.164 2.021,-12.306 3.619,-12.306 3.912,-12.598 3.912,-13.585 3.333,-14.164 R27.1@3.333,-14.309 2.849,-14.309 2.431,-14.726 R28.2@2.431,-17.214 ; D2.1@2.731,-15.764 D2.1@2.781,-15.714 ; R27.1@3.182,-14.3 R27.1@3.182,-14.155
RUN_POWER: R23.2 U2.6 | length 7
  Top Layer w0.2: -5.918,-20.556 -5.918,-19.99 -5.842,-19.914 -5.334,-19.914 -5.065,-19.645 -5.065,-18.884 -2.335,-16.154 U2.6@-1.493,-16.154
SIGN: C23.1 C26.1 C27.1 C30.1 pad.0@1.499,9.652 pad.0@4.254,8.23 R5.2 | length 45.1
  Top Layer w0.2: v1(4.343,-4.293) 5.494,-4.293 R5.2@5.64,-4.147 ; 4.826,-4.293 ccw(c4.826,-4.775) 4.485,-4.434 cw(c4.826,-4.775) 4.826,-4.293 ; 4.826,-4.293 cw(c4.826,-3.81) 4.485,-4.151 ccw(c4.826,-3.81) 4.826,-4.293
  Bottom Layer w0.2: pad.0@1.499,9.652 2.976,8.174 ; pad.0@1.896,8.714 cw(c2.041,7.795) 2.698,8.452 ; pad.0@1.927,8.516 cw(c2.116,7.314) 2.976,8.174 ; pad.0@2.431,9.341 ccw(c3.047,9.061) 2.568,8.582 ; pad.0@2.613,9.258 ccw(c3.327,8.933) 2.772,8.378 ; pad.0@2.795,9.175 ccw(c3.607,8.805) 2.976,8.174 ; pad.0@4.254,8.23 3.353,7.328 3.353,3.683 3.708,3.327 3.708,2.524 3.708,1.743 3.708,-4.14 3.861,-4.293 v1(4.343,-4.293)
  Bottom Layer w2: pad.0@1.499,9.652 1.499,8.814 2.593,7.719 ; pad.0@1.572,9.475 cw(c-0.894,7.009) 2.593,7.009 ; pad.0@1.605,9.448 cw(c0.264,7.543) 2.593,7.543 ; pad.0@1.995,9.609 ccw(c4.115,9.241) 2.593,7.719 ; 2.593,7.719 2.593,3.061 3.521,2.134 ; 3.521,2.134 cw(c4.021,2.134) 3.708,2.524 cw(c4.021,2.134) 4.521,2.134 ; 3.521,2.134 ccw(c4.021,2.134) 3.708,1.743 ccw(c4.021,2.134) 4.521,2.134 ; 4.521,2.134 ccw(c4.021,2.134) 4.521,2.134
SWITCH: Q2.B U2.17 | length 19
  Top Layer w0.2: U2.17@-7.493,-17.454 -7.393,-17.354 -6.748,-17.354 -4.088,-14.694 -4.088,-11.706 ; v1(-3.759,-11.481) -3.759,-11.432 -3.786,-11.405 -4.088,-11.706 ; 2.307,-9.765 ccw(c2.398,-10.103) v1(2.055,-10.033) ; 2.323,-9.781 cw(c1.985,-9.691) v1(2.055,-10.033) ; Q2.B@2.462,-9.176 2.462,-9.626 v1(2.055,-10.033) ; -4.088,-11.706 cw(c-3.934,-11.86) -3.843,-11.662 ccw(c-3.934,-11.86) -4.088,-11.706 ; 2.397,-9.692 ccw(c2.738,-10.033) 2.255,-10.033 cw(c2.738,-10.033) 2.397,-9.692 ; 2.397,-9.692 cw(c2.055,-9.35) 2.055,-9.833 ccw(c2.055,-9.35) 2.397,-9.692 ; -4.028,-11.646 ccw(c-4.192,-11.481) -3.959,-11.481 cw(c-4.192,-11.481) -4.028,-11.646
  Bottom Layer w0.2: v1(-3.759,-11.481) 1.194,-11.481 2.055,-10.619 v1(2.055,-10.033)
TX_GND: C7.1 C21.2 C22.2 C28.1 C29.1 Q8.E1 Q8.E2 R13.2 U3.5 | length 78.6
  Top Layer w0.2: -8.096,12.25 -8.096,11.1 -7.496,10.5 ; C7.1@5.593,-18.53 5.593,-18.079 6.304,-17.368 U3.5@6.304,-16.565
  Top Layer w1: C28.1@-14.996,7.642 -15.066,7.571 C29.1@-13.44,7.571 ; C29.1@-13.451,7.486 -8.536,7.486 ; -8.525,7.571 -7.496,8.6 -7.496,10.5
  Bottom Layer w0.2: v1(-6.198,15.85) -6.073,15.725 -5.895,15.725 ; v1@-6.063,15.702 cw(c-5.968,15.597) -5.867,15.697 ; v1@-6.04,15.727 cw(c-5.788,15.53) -5.788,15.85 ; v1@-6.04,15.973 ccw(c-5.788,16.169) -5.788,15.85 ; v1@-6.02,15.697 -5.867,15.697 ; v1@-6.02,15.942 ccw(c-5.663,16.127) -5.663,15.725 ; v1@-6.018,15.937 ccw(c-5.636,16.122) -5.636,15.697 ; v1(6,-16.5) 6,-16.75 6.148,-16.898 ; -5.895,15.725 -6.02,15.85 -5.788,15.85 ; -5.895,15.725 -5.867,15.697 ; -5.895,15.725 -5.663,15.725 ; -5.867,15.697 -5.636,15.697 ; -5.788,15.85 -5.663,15.725 ; -5.663,15.725 -4.265,15.725 ; -5.663,15.725 -5.636,15.697 ; -5.636,15.697 -4.293,15.697 -4.265,15.725 ; -4.265,15.725 -4.066,15.725 -2.89,16.901 1.096,16.901 4.041,13.956 10.217,13.956 11.936,12.238 14.081,12.238 14.304,12.014 14.304,-15.268 14.122,-15.45 13.202,-15.45 11.755,-16.898 6.148,-16.898 ; 6.148,-16.898 cw(c6.279,-16.766) 6.145,-16.638 ccw(c6.279,-16.766) 6.148,-16.898
TX_VCC: C14.1 C15.1 C16.1 C21.1 C22.1 C24.2 C25.2 C34.2 J1.1 Q3.6 Q4.6 Q5.E1 Q5.E2 Q6.6 Q7.6 R26.2 R33.1 R34.2 U4.Vin U5.14 | length 109
  Top Layer w0.2: R26.2@-11.34,-0.852 -11.047,-0.56 -8.076,-0.56 ; Q7.6@-7.619,-1.564 -7.619,-1.017 -8.076,-0.56 ; Q6.6@-3.619,-1.564 -4.623,-0.56 -8.076,-0.56 ; J1.1@1.3,19.366 1.3,17.979 1.854,17.424
  Top Layer w0.3: Q6.6@-3.569,-1.614 Q6.6@-3.619,-1.564 -3.617,-1.564 -3.075,-1.023 -3.075,-0.982 v1(-3.092,-0.966) ; v1(-2.491,-3.715) -2.491,-4.265 -2.235,-4.521 ; U5.14@-1.734,-4.472 U5.14@-1.416,-4.472 -1.392,-4.496 -2.21,-4.496 -2.235,-4.521 ; 2.309,13.544 2.407,13.642 2.341,13.708 2.341,13.738 ; 2.829,15.547 2.956,15.674 ; Q3.6@6.004,-1.6 6.004,-1.3 R33.1@5.454,-0.75 5.504,-0.7 5.504,0 ; Q4.6@9.756,-1.564 9.756,-1.302 R34.2@9.204,-0.75 9.204,0 ; 12.806,-2.877 11.58,-2.877 11.206,-2.502 11.206,0.075 ; U4.Vin@14.254,-6.071 14.254,-2.792 ; 16.618,13.642 16.954,13.305 16.954,0.364 16.584,-0.007 11.288,-0.007 11.206,0.075 ; -2.491,-4.077 ccw(c-2.853,-4.077) -2.597,-3.821 cw(c-2.853,-4.077) -2.491,-4.077 ; -2.491,-4.077 cw(c-2.129,-4.077) -2.385,-3.821 ccw(c-2.129,-4.077) -2.491,-4.077 ; -2.235,-4.521 1.572,-4.521 3.254,-2.839 3.254,-0.459 3.713,0 5.504,0 ; 5.504,0 9.204,0 ; 9.204,0 9.642,0.437 10.844,0.437 11.206,0.075 ; -3.4,-1.347 ccw(c-3.782,-0.966) -3.242,-0.966 cw(c-3.782,-0.966) -3.4,-1.347
  Top Layer w0.5: C21.1@-4.001,12.652 C22.1@-4.001,13.49 ; C22.1@-3.976,14.201 -4.001,14.176 C22.1@-4.001,13.49 ; 0.665,13.642 0.763,13.544 ; 0.776,13.531 0.763,13.544 ; 1.517,17.006 1.948,16.575 2.431,16.575 2.829,16.177 2.829,15.547 2.829,14.226 2.341,13.738 2.147,13.544 0.763,13.544 ; 6.004,13.033 6.436,12.601 ; Q5.E2@9.369,10.037 9.369,11.635 8.754,12.25 4.504,12.25 6.004,10.75 C25.2@6.004,7.7 C24.2@13.754,7.7 13.754,9.705 ; Q5.E1@11.909,10.037 12.172,10.037 12.798,10.662 13.754,9.705 ; 12.857,11.148 13.754,10.25 13.754,9.705 ; C22.1@-4.001,13.49 -3.946,13.544 0.059,13.544 0.763,13.544
  Bottom Layer w0.3: v1(-3.092,-0.966) -3.092,-3.114 v1(-2.491,-3.715) ; -3.092,-1.328 ccw(c-3.454,-1.328) -3.198,-1.072 cw(c-3.454,-1.328) -3.092,-1.328 ; -3.092,-1.328 cw(c-2.73,-1.328) -2.986,-1.072 ccw(c-2.73,-1.328) -3.092,-1.328 ; -2.747,-3.459 ccw(c-2.491,-3.203) -2.491,-3.565 cw(c-2.491,-3.203) -2.747,-3.459 ; -2.747,-3.459 cw(c-3.003,-3.715) -2.641,-3.715 ccw(c-3.003,-3.715) -2.747,-3.459
UP-A: Q3.2 Q3.5 R36.2 | length 44.8
  Top Layer w0.2: R36.2@-9.819,-5.964 -12.25,-5.964 -12.528,-5.686 -12.528,-3.613 -13.517,-2.624 -13.517,-0.224 -13.403,-0.11 -4.132,-0.11 ; -4.093,-0.17 cw(c-4.177,-0.546) v1(-3.81,-0.432) ; -4.071,-0.148 ccw(c-3.696,-0.064) v1(-3.81,-0.432) ; 2.682,-4.727 cw(c2.139,-4.581) v1(2.386,-5.087) ; Q3.2@4.004,-2.25 5.008,-2.25 5.338,-2.25 ; Q3.5@6.004,-2.25 5.338,-2.25 ; -4.132,-0.11 ccw(c-3.836,0.187) -3.818,-0.232 cw(c-3.836,0.187) -4.132,-0.11 ; -4.132,-0.11 cw(c-4.428,-0.406) -4.01,-0.423 ccw(c-4.428,-0.406) -4.132,-0.11 ; -4.132,-0.11 v1(-3.81,-0.432) ; v1(2.386,-5.087) cw(c2.824,-5.087) 2.514,-4.776 ccw(c2.824,-5.087) v1(2.386,-5.087) ; v1(2.386,-5.087) 2.508,-4.964 2.508,-4.782 3.671,-3.619 5.075,-3.619 5.288,-3.407 5.288,-2.301 5.338,-2.25 ; v1@2.586,-5.087 cw(c3.507,-5.087) 2.855,-4.435 ccw(c3.507,-5.087) v1@2.586,-5.087
  Bottom Layer w0.2: v1(-3.81,-0.432) -3.755,-0.683 -3.755,-1.517 ; v1@-3.806,-0.353 -3.806,-1.466 -3.755,-1.517 ; v1(2.386,-5.087) 1.928,-4.629 -3.431,-4.629 -3.755,-4.306 -3.755,-1.517 ; v1@-3.951,-0.573 cw(c-4.426,-1.048) -3.755,-1.048 ccw(c-4.426,-1.048) v1@-3.951,-0.573 ; v1@-3.951,-0.573 cw(c-4.303,-0.925) -3.806,-0.925 ccw(c-4.303,-0.925) v1@-3.951,-0.573 ; v1@-3.669,-0.573 ccw(c-3.46,-0.781) -3.755,-0.781 cw(c-3.46,-0.781) v1@-3.669,-0.573 ; v1@-3.669,-0.573 ccw(c-3.338,-0.904) -3.806,-0.904 cw(c-3.338,-0.904) v1@-3.669,-0.573
UP-B: Q4.2 Q4.5 R41.2 | length 22.5
  Top Layer w0.2: R41.2@0.831,-11.811 1.243,-11.811 1.699,-11.355 2.999,-11.355 v1(3.381,-10.973) ; 3.114,-11.225 cw(c3.451,-11.315) v1(3.381,-10.973) ; 3.129,-11.24 ccw(c3.039,-10.903) v1(3.381,-10.973) ; Q4.2@7.756,-2.214 8.754,-2.214 ; v1(8.754,-1.75) 8.754,-2.214 ; Q4.5@9.756,-2.214 8.754,-2.214 ; 3.04,-11.314 ccw(c2.699,-10.973) 3.181,-10.973 cw(c2.699,-10.973) 3.04,-11.314 ; 3.04,-11.314 cw(c3.381,-11.656) 3.381,-11.173 ccw(c3.381,-11.656) 3.04,-11.314 ; 8.754,-2.214 ccw(c8.317,-2.214) 8.617,-1.895 cw(c8.317,-2.214) 8.754,-2.214 ; 8.754,-2.214 cw(c9.192,-2.214) 8.892,-1.895 ccw(c9.192,-2.214) 8.754,-2.214
  Bottom Layer w0.2: v1(3.381,-10.973) 3.431,-10.923 3.431,-6.314 3.931,-5.814 5.567,-5.814 5.745,-5.636 5.745,-2.988 5.915,-2.817 7.726,-2.817 7.904,-2.639 7.904,-2.601 v1(8.754,-1.75)
VCC: C1.2 C5.2 C13.2 C17.2 C19.2 R6.1 R9.1 R30.1 U2.9 U3.8 | length 59.6
  Top Layer w0.2: R6.1@-10.001,-16.362 -10.001,-15.743 v1(-9.879,-15.621) ; R9.1@6.379,-7.696 5.958,-7.696 5.654,-8 5.654,-12.014 6.136,-12.497 6.136,-13.477 7.061,-14.402 9.5,-14.402 v1(9.881,-14.783) ; v1(-9.879,-15.621) ccw(c-9.608,-15.906) -10.001,-15.906 cw(c-9.608,-15.906) v1(-9.879,-15.621) ; R6.1@-10.001,-16.372 cw(c-9.163,-16.372) -9.741,-15.766 ccw(c-9.163,-16.372) R6.1@-10.001,-16.372
  Top Layer w0.3: U2.9@-1.493,-14.204 -0.109,-14.204 C1.2@0.131,-13.964 0.131,-15.041 C13.2@0.381,-15.291 ; R30.1@16.004,-12.325 16.004,-13.121 C19.2@15.304,-13.821 15.304,-17.666 14.457,-18.514 C17.2@9.881,-18.514 10.114,-18.282 U3.8@10.114,-16.565 10.114,-15.088 ; 10.063,-15.037 cw(c10.195,-14.904) 10.021,-14.837 ccw(c10.195,-14.904) 10.063,-15.037 ; 10.063,-15.037 10.114,-15.088 ; 10.114,-15.088 cw(c10.333,-14.868) 10.028,-14.811 ccw(c10.333,-14.868) 10.114,-15.088 ; C1.2@0.131,-14.182 ccw(c0.652,-14.182) 0.284,-14.55 cw(c0.652,-14.182) C1.2@0.131,-14.182 ; v1@9.88,-14.933 cw(c9.88,-15.166) 10.114,-15.166 ccw(c9.88,-15.166) v1@9.88,-14.933
  Bottom Layer w0.2: -9.72,-16.034 ccw(c-10.225,-15.991) v1(-9.879,-15.621) ; v1@0.152,-14.656 0.229,-14.732 0.229,-15.941 -0.036,-16.205 -9.576,-16.205 ; v1(-9.879,-15.621) ccw(c-9.554,-15.739) -9.798,-15.983 cw(c-9.554,-15.739) v1(-9.879,-15.621) ; v1(-9.879,-15.621) -9.879,-15.902 -9.576,-16.205 ; -9.576,-16.205 cw(c-9.227,-15.857) -9.691,-15.689 ccw(c-9.227,-15.857) -9.576,-16.205
  Bottom Layer w0.3: v1@0.152,-14.656 v1(0.178,-14.656) 9.855,-14.656 9.906,-14.707 9.906,-14.757 v1(9.881,-14.783) ; 0.54,-14.656 ccw(c0.54,-15.018) 0.284,-14.762 cw(c0.54,-15.018) 0.54,-14.656 ; 0.54,-14.656 cw(c0.54,-14.294) 0.284,-14.55 ccw(c0.54,-14.294) 0.54,-14.656
VSW: C24.1 C28.2 pad.1@-2.286,1.829 Q5.C2 Q8.C1 | length 38.7
  Top Layer w0.5: -15.19,5.646 C28.2@-15.19,6.171 ; -12.797,3.254 -12.797,2.441 -12.531,2.174 -10.299,2.174 -9.499,2.974 Q8.C1@-9.361,2.974 ; -9.361,2.615 Q8.C1@-9.361,2.974 ; Q8.C1@-9.361,3.674 Q8.C1@-9.361,2.974 ; Q8.C1@-7.844,2.974 Q8.C1@-9.361,2.974 ; 5.754,2.5 6.504,1.75 7.254,1.75 ; Q5.C2@8.099,3.837 8.099,2.845 7.754,2.5 9.004,2.5 9.369,2.865 Q5.C2@9.369,3.837 ; C24.1@13.754,6.3 13.754,6.25 14.504,5.5 14.504,5
  Top Layer w1: 4.97,3.284 5.754,2.5 7.754,2.5
  Top Layer w1.5: -15.651,4.831 -13.259,2.438 ; 3.267,1.75 6.504,1.75 ; 7.254,1.75 14.254,1.75 14.504,2 14.504,5
  Bottom Layer w2: pad.1@-1.93,2.057 ccw(c-2.43,2.057) pad.1@-1.93,2.057
pads on no net: J1.4 U4. U5.

## Polygon pours and split planes (outlines as drawn)
VSW on Top Layer "Top Layer-No Net" (solid, remove dead copper, pour order 99): 13.746,6.338 16.46,6.338 16.641,6.145 16.638,6.149 16.616,6.149 16.616,1.292 15.854,0.483 15.194,0.483 -2.332,0.483 -2.815,0.995 -2.84,0.968 -5.355,0.968 -5.634,0.968 -5.965,1.319 -6.244,1.616 -6.93,1.616 -7.108,1.616 -7.362,1.346 -7.412,1.292 -7.819,1.292 -13.127,1.292 -13.407,1.589 -13.458,1.643 -13.458,3.046 -13.458,3.235 -13.559,3.343 -13.646,3.436 -14.061,3.436 -14.535,3.436 -14.702,3.613 -14.702,4.584 -14.702,4.611 -14.931,4.854 -15.286,5.232 -16.353,5.232 -16.48,5.367 -16.48,6.5 -16.404,6.581 -16.379,6.581 -14.245,6.581 -14.169,6.5 -14.169,5.475 -14.093,5.394 -12.496,3.697 -12.496,3.235 -12.496,2.375 -12.416,2.291 -12.365,2.237 -11.901,2.237 -10.333,2.237 -10.156,2.425 -10.105,2.479 -10.105,2.722 -10.105,4.422 -9.978,4.557 -4.593,4.557 -4.339,4.287 -4.034,3.964 -3.78,3.964 7.243,3.964 7.497,4.233 7.955,4.719 8.082,4.719 9.783,4.719 9.91,4.584 9.91,2.641 10.139,2.398 12.806,2.398 12.882,2.479 12.958,2.56 12.958,2.614 12.958,5.987 13.289,6.338
TX_VCC on Top Layer "Top Layer-No Net" (solid, remove dead copper, pour order 93): -6.593,13.775 -6.593,14.225 -6.307,14.511 -6.231,14.588 -3.081,14.588 0.932,14.588 1.11,14.41 1.161,14.461 3.066,14.461 3.472,14.461 3.853,14.842 3.929,14.918 16.299,14.918 16.629,14.588 16.629,7.12 16.502,6.993 16.299,6.79 15.664,6.79 12.718,6.79 12.692,6.764 12.667,6.739 11.295,6.739 5.352,6.739 5.149,6.942 4.59,7.501 4.59,9.508 4.59,10.955 4.082,11.463 4.006,11.54 2.964,11.54 -7.12,11.54 -7.196,11.463 -7.348,11.616 -7.348,13.775
TX_GND on Top Layer "Top Layer-No Net" (solid, remove dead copper, pour order 81): -6.7,14.4 -6.802,14.502 -6.802,16.229 -12.39,16.229 -12.669,15.949 -12.796,15.822 -12.796,15.619 -12.796,15.365 -12.948,15.213 -13.253,14.908 -14.98,14.908 -15.869,14.908 -16.073,14.705 -16.123,14.654 -16.123,6.018 -8.656,6.018 -8.478,6.196 -8.402,6.272 -7.284,6.272 -3.144,6.272 -3.017,6.399 -3.119,6.501 -3.119,8.431 -3.119,9.955 -3.474,10.311 -3.5,10.285 -4.668,10.285 -5.334,10.285 -5.436,10.387 -5.436,13.415 -5.481,13.46 -5.862,13.841 -6.246,13.841 -6.246,13.946 -6.344,14.044
TX_VCC on Top Layer "Top Layer-No Net" (solid, remove dead copper, pour order 63): 7.729,14.859 6.37,16.218 6.007,16.218 3.477,16.218 3.324,16.37 3.055,16.639 3.055,17.666 3.055,18.656 2.725,18.986 3.055,18.656 3.055,17.589 3.03,17.564 1.049,17.564 1.086,17.526 1.086,16.04 1.086,15.697 1.226,15.557 2.005,14.779 2.005,14.592 2.005,14.087 2.344,13.748
GND on Top Layer "Top Layer-No Net" (solid, remove dead copper, pour order 75): -2.548,22.33 -2.543,22.336 -2.543,23.072 -2.561,23.053 -4.956,23.053 -4.981,23.028 -4.981,19.573 -7.394,19.573 -7.419,19.599 -7.419,22.266 -7.445,22.291 -9.502,22.291 -13.084,20.843 -15.217,19.802 -17.275,17.668 -17.224,-17.714 -15.725,-19.086 -11.839,-21.719 -7.648,-23.658 -1.501,-24.877 3.96,-24.623 9.065,-23.302 12.57,-21.727 17.777,-17.866 17.828,17.516 15.644,19.853 10.234,22.24 8.43,22.263 8.456,19.573 5.255,19.649 5.043,19.853 5.027,23.072 -2.568,23.072
NetC23_2 on Top Layer "Top Layer-No Net" (solid, remove dead copper, pour order 10): -13.767,6.274 -13.614,6.426 -13.614,6.623 -11.013,6.623 -10.82,6.816 -10.813,6.808 -5.216,6.808 -5.216,6.663 -4.928,6.375 -4.902,6.35 -4.775,6.35 5.137,6.35 5.41,6.623 5.416,6.629 6.304,6.629 12.573,6.629 12.827,6.375 12.882,6.32 12.882,4.328 12.882,2.692 12.751,2.56 12.73,2.56 10.148,2.56 9.91,2.798 9.91,4.612 9.677,4.845 9.652,4.87 9.652,4.875 8.113,4.875 7.91,4.672 7.796,4.672 7.188,4.064 7.088,3.964 3.681,3.964 3.681,3.938 3.426,3.683 -4.619,3.683 -4.619,4.492 -4.775,4.648 -9.839,4.648 -9.987,4.5 -9.987,2.592 -10.181,2.398 -10.205,2.375 -12.496,2.375 -12.496,3.613 -14.169,5.286 -14.169,5.475 -14.169,6.503 -14.222,6.557 -14.098,6.68 -13.665,6.68 -13.665,6.401 -13.716,6.35
SIGN on Top Layer "Top Layer-No Net" (solid, remove dead copper, pour order 12): -3.884,7.528 -4.953,8.597 -4.953,8.839 -4.953,9.058 -4.837,9.174 -4.832,9.169 -4.538,9.169 -4.089,9.169 -3.861,9.398 -3.621,9.638 -3.621,10.161 -3.621,11.155 -3.397,11.379 4.039,11.379 4.47,10.947 4.47,9.042 4.674,8.839 4.14,8.306 4.14,7.62 4.048,7.528 -3.884,7.528
GND on Bottom Layer "Top Layer-No Net" (solid, remove dead copper, pour order 69): -2.792,22.194 -2.786,22.199 -2.786,22.936 -2.805,22.917 -5.199,22.917 -5.224,22.891 -5.224,19.437 -7.637,19.437 -7.663,19.462 -7.663,22.129 -7.688,22.155 -9.746,22.155 -13.327,20.707 -15.461,19.666 -17.518,17.532 -17.467,-17.85 -15.969,-19.222 -12.082,-21.855 -7.891,-23.794 -1.745,-25.013 3.716,-24.759 8.822,-23.438 12.327,-21.863 17.534,-18.003 17.585,17.38 15.4,19.716 9.99,22.104 8.187,22.126 8.212,19.437 5.012,19.513 4.8,19.716 4.783,22.936 -2.811,22.936

## Keep-outs
Keep-Out Layer:
  circle w0.3: c15.004,16.783 r1.1
  circle w0.1: c0.004,-1.532 r2.5
  circle w0.1: c-9.645,20.747 r1
  circle w0.1: c10.006,20.697 r0.6
  circle w0.1: c-4.647,17.161 r0.75
  circle w0.1: c4.353,17.161 r1
  circle w0.1: c-4.621,10.161 r1
  circle w0.1: c4.353,10.161 r0.8
  circle w0.3: c-14.993,16.783 r1.1
  lines w0.1: -5.229,22.983 4.771,22.983
  lines w0.2: -14.978,20.012 cw(c0.015,-8.541) -9.79,22.182 ; -9.729,22.174 -7.697,22.174 -7.697,19.456 -5.233,19.456 ; -5.229,19.456 -5.229,22.983 ; 4.771,22.983 4.771,19.644 4.934,19.481 8.153,19.481 8.153,22.174 9.753,22.174 cw(c-0.052,-8.55) 14.941,20.003
  lines w0.3: -17.541,17.413 -14.966,19.989 ; -17.501,-17.88 ccw(c0.004,-0.032) 17.463,-17.926 ; -17.496,-17.93 -17.496,17.452 ; -17.49,-17.864 ccw(c0.016,-0.016) 17.46,-17.923 ; 14.929,19.98 17.504,17.405 17.504,-17.879 ; 17.523,-17.93 17.523,17.452

## Other copper
Top Layer:
  region net TX_GND: -5.637,11.873 -7.343,11.873 -7.343,11.16 -5.637,11.16
  rectangle net TX_VCC: 12.449,-5.179 16.286,-1.6
  rectangle net GND: -2.466,14.656 0.665,16.157
  rectangle net TX_VCC: 0.353,13.033 2.57,14.049
  region net 5V: 16.954,-5.908 14.947,-5.908 14.947,-11.675 16.954,-11.675
  region net VSW: -2.032,2.33 -14.199,2.33 -14.199,0.711 -2.032,0.711
  region net TX_GND: -6.02,16.053 -7.595,16.053 -7.595,13.208 -6.02,13.208
  region net TX_VCC: 1.829,18.898 1.219,18.898 1.219,17.006 1.829,17.006
  region net TX_VCC: 1.321,13.665 -1.489,13.665 -1.489,12.601 1.321,12.601
  region net SIGN: 4.877,8.839 -4.953,8.839 -4.953,6.739 4.877,6.739
  region net NetC23_2: 3.426,6.121 -4.619,6.121 -4.619,3.683 3.426,3.683

## Silkscreen, mask and mechanical layers (free items; w line width, h text height)
Top Overlay:
  circle w0.3: c-14.897,16.808 r2.5
  circle w0.3: c14.872,16.734 r2.5
  lines w0.2: 10.709,-15.365 10.709,-11.565
  text "NTC" at -11.422,-21.819 h0.8 r45
Bottom Overlay:
  circle w0.3: c14.937,16.757 r1.8
  circle w0.3: c-14.985,16.783 r1.8
  text "10W" at 11.909,10.037 h1.52
  text "For" at 11.709,7.239 h1.52
  text "Iphone X" at 11.844,4.852 h1.52
  text "SANSUNG" at 11.887,2.108 h1.52
  text "BP-Q5107W5AA0" at 7.98,-12.317 h1.27
  text "2018-03-04" at 6.408,-14.783 h1.27
Top Solder:
  circle w2: c-6.278,2.108 r0.4
  circle w2: c6.333,2.057 r0.5
  region: 0.229,11.046 -2.586,11.046 -2.586,8.458 0.229,8.458
  region: -5.374,2.277 -9.359,2.277 -9.359,0.933 -5.374,0.933
Bottom Solder:
  circle w2: c3.993,2.159 r0.3
  circle w2: c-2.434,2.032 r0.3
Mechanical 4:
  circle w0.1: c-14.996,17.977 r1.25
  circle w0.1: c0.004,-1.032 r2.5
  lines w0.1: -16.236,17.977 -13.746,17.977 ; 13.837,17.978 16.328,17.978

## Text inside footprints (layer, text, board x,y; h text height)
LED2: Top Overlay "+" at -10.872,20.315 h0.5 r180; Top Overlay "B" at -7.989,18.652 h0.5; Top Overlay "G" at -10.058,19.823 h0.5; Top Overlay "R" at -12.167,19.807 h0.5
LED3: Top Overlay "+" at 10.299,20.29 h0.5 r180; Top Overlay "B" at 12.001,19.807 h0.5; Top Overlay "G" at 10.934,19.858 h0.5; Top Overlay "R" at 7.98,19.376 h0.5
LED4: Top Overlay "R" at -2.723,-23.575 h0.6; Top Overlay "G" at 2.43,-23.602 h0.6